# Allegro board OPAMP_TEST_V10A.brd
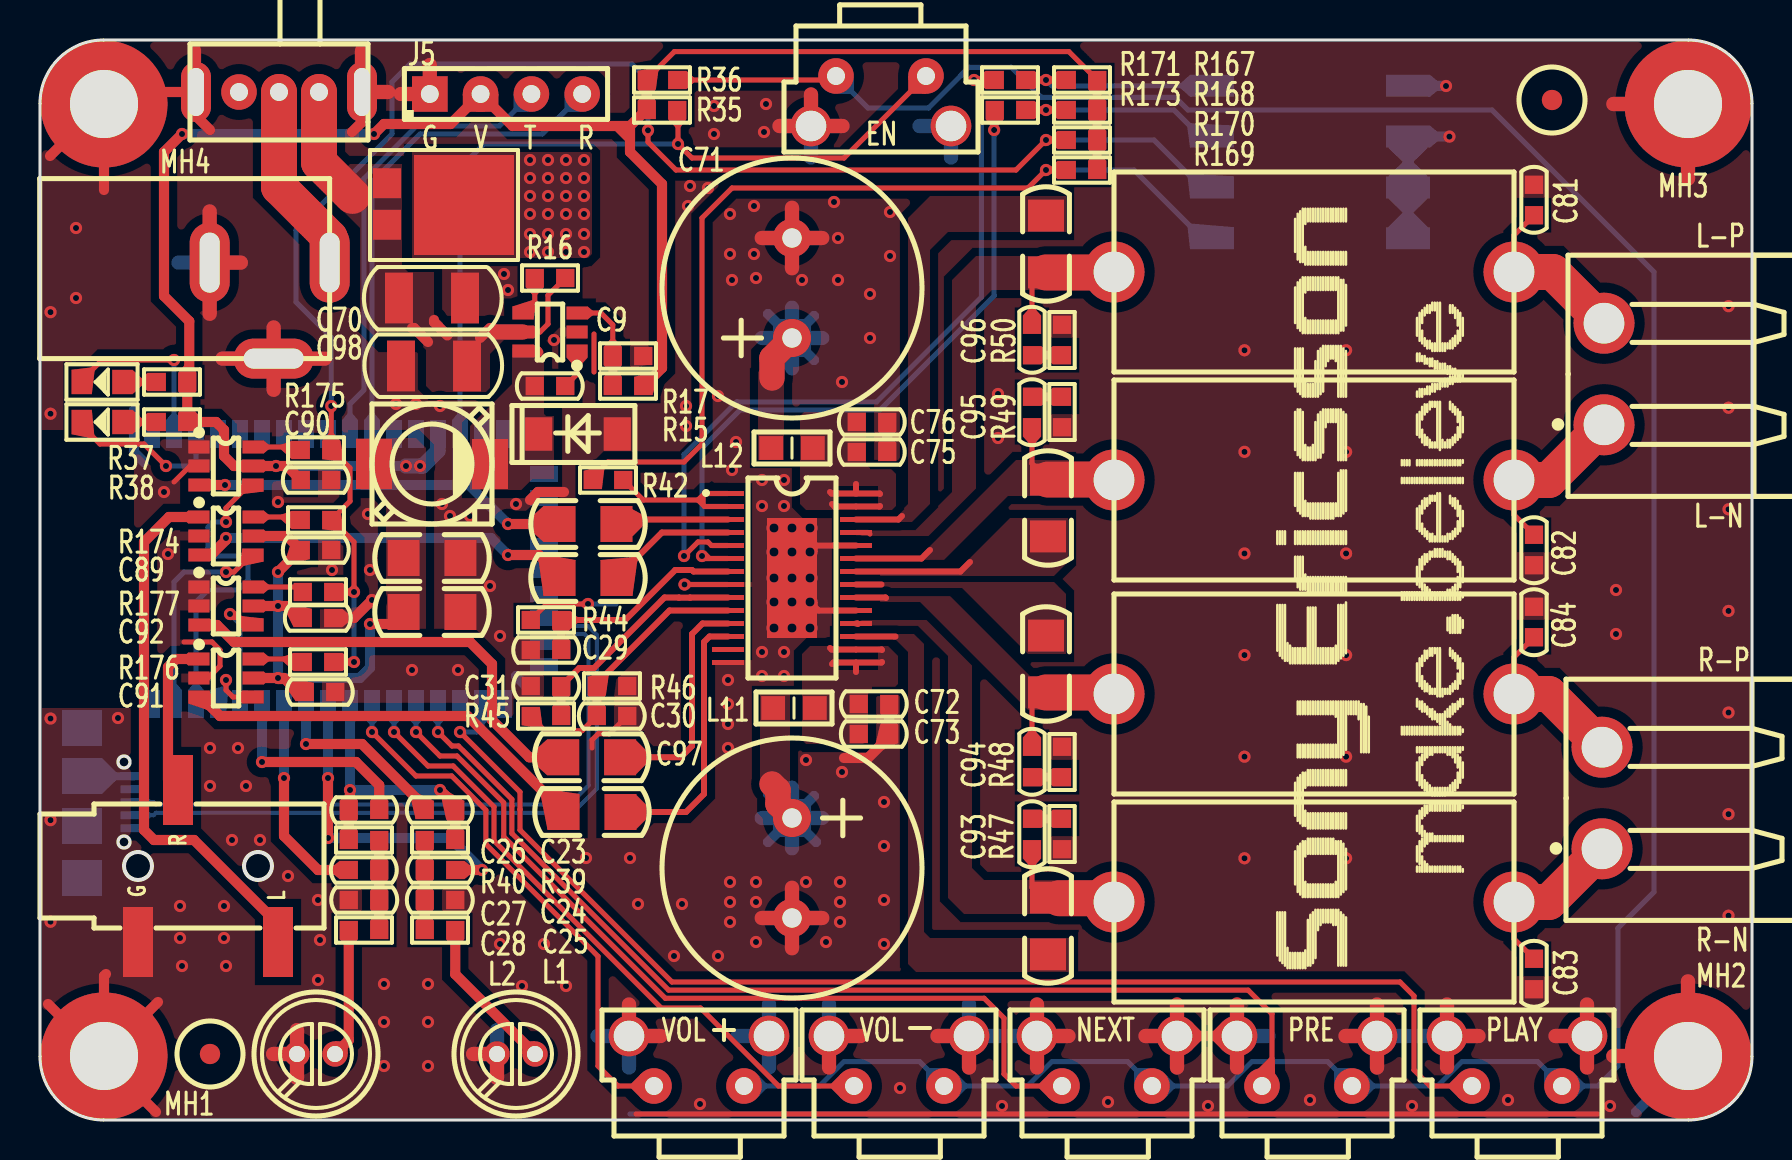
[diagram p0: board, top side]
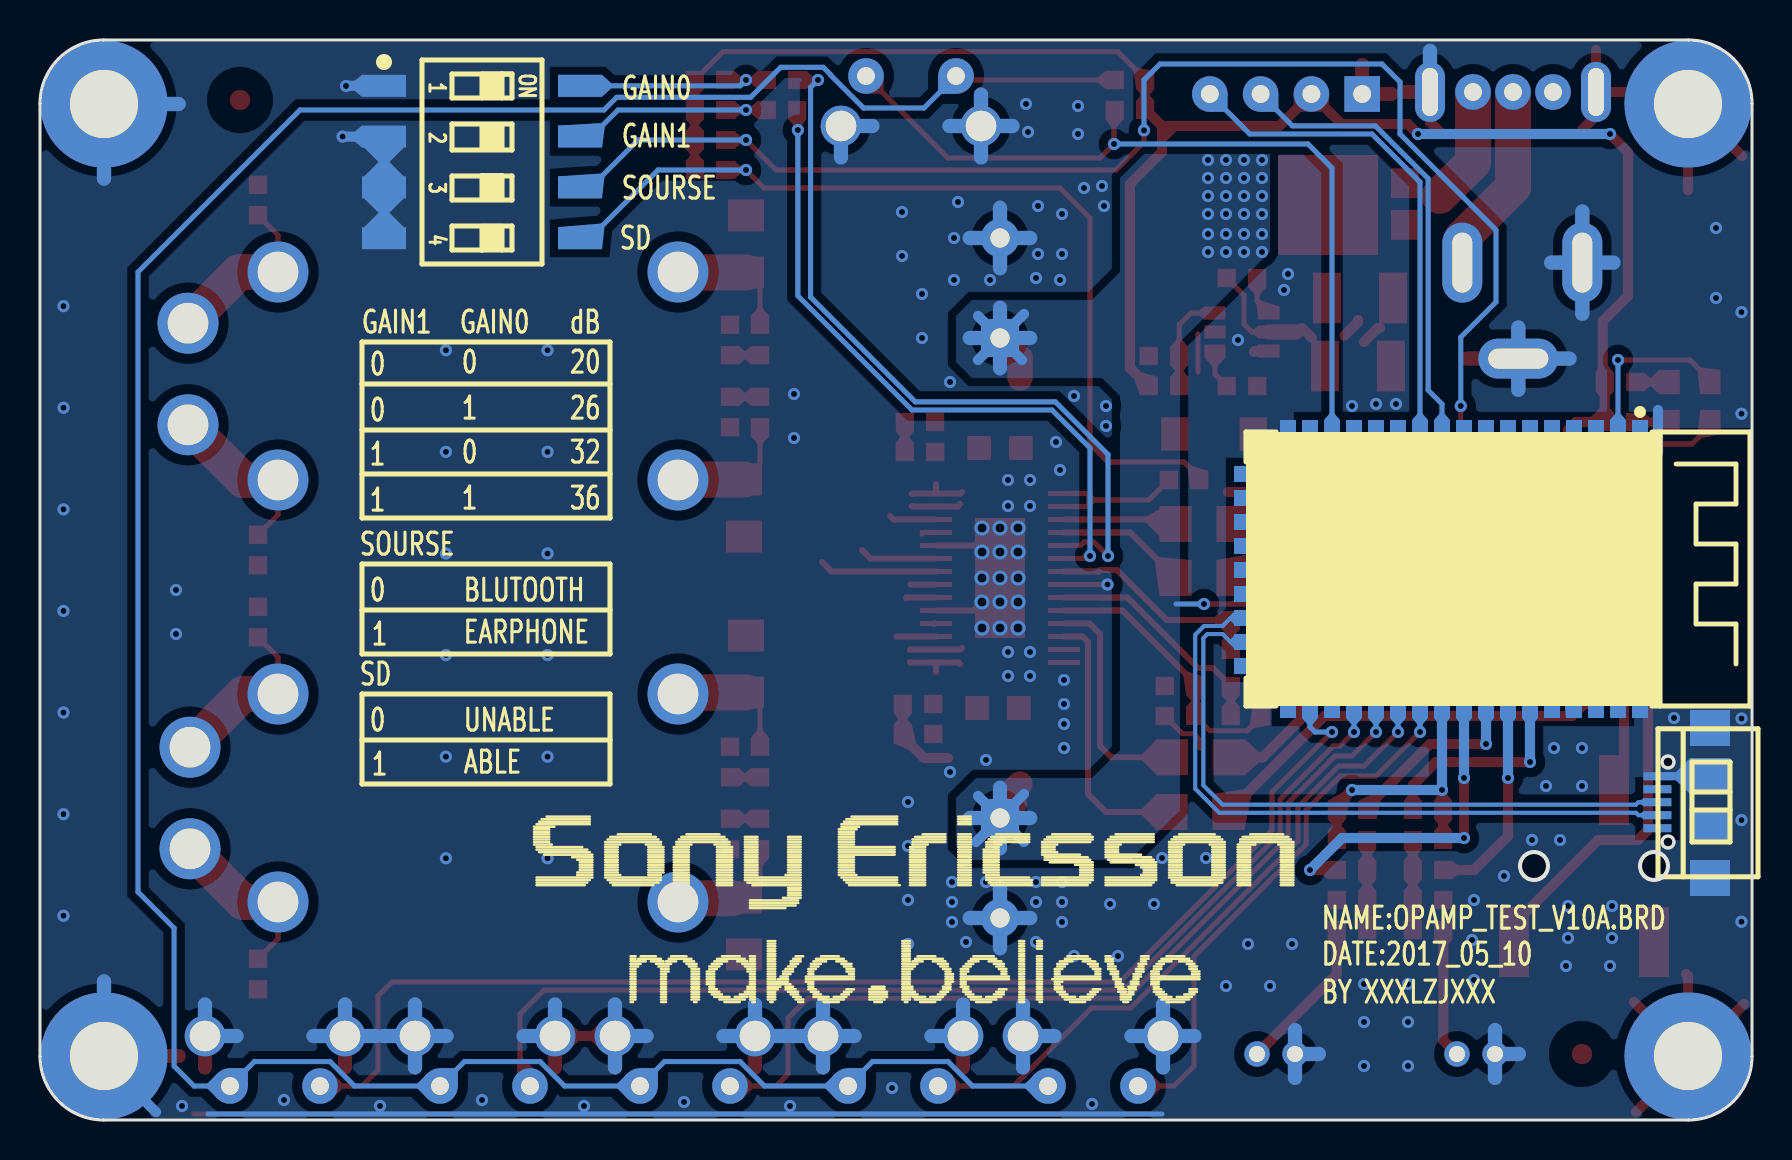
[diagram p1: board, bottom side, seen from below]

Outline 85.6 x 54 mm; copper layers: TOP, BOTTOM. Coordinates in mm from the lower left corner of the outline.
Outline path: 0,50.82 0,3.18 arc(0.93,0.93) 3.18,0 82.42,0 arc(84.67,0.93) 85.6,3.18 85.6,50.82 arc(84.67,53.07) 82.42,54 3.18,54 arc(0.93,53.07) 0,50.82

## Design rules (mm)
net group DP1: nets USB_DN USB_DP

## Placement (name value [footprint] x y rotation side)
C9  10nF_50V  [CC0603]  25.5 36.7 180 top
C10  22uF_10V  [CC1206]  19.6 28.1 0 top
C11  22uF_10V  [CC1206]  19.6 25.4 0 top
C23  0.1uF_50V  [CC0603]  20 15.5 180 top
C24  0.1uF_50V  [CC0603]  20 12.5 0 top
C25  15pF_50V  [CC0603]  20 11 180 top
C26  0.1uF_50V  [CC0603]  16.2 15.5 0 top
C27  0.1uF_50V  [CC0603]  16.2 12.5 180 top
C28  15pF_50V  [CC0603]  16.2 11 0 top
C29  0.1uF_50V  [CC0603]  25.3 23.5 0 top
C30  0.1uF_50V  [CC0603]  28.6 20.2 180 top
C31  0.1uF_50V  [CC0603]  25.3 21.7 0 top
C70  2.2uF_100V  [CC1210]  19.6 41.1 0 top
C71  1000uF_63V_16X20  [CAP-7R5-16X25]  37.6 39.1 90 top
C72  0.1uF_50V  [CC0603]  41.7 20.8 180 top
C73  1nF_50V  [CC0603]  41.7 19.3 180 top
C75  0.1uF_50V  [CC0603]  41.6 33.4 180 top
C76  1nF_50V  [CC0603]  41.6 34.9 180 top
C77  0.22uF_100V  [CC1206]  50.3 43.8 270 top
C78  0.22uF_100V  [CC1206]  50.4 30.6 90 top
C79  0.22uF_100V  [CC1206]  50.4 9.7 90 top
C80  0.22uF_100V  [CC1206]  50.3 22.8 270 top
C81  1nF_50V  [CC0603]  74.7 46 90 top
C82  1nF_50V  [CC0603]  74.7 28.5 270 top
C83  1nF_50V  [CC0603]  74.7 7.3 90 top
C84  1nF_50V  [CC0603]  74.7 24.9 270 top
C85  1uF_50V  [CC1206]  27.6 15.4 180 top
C86  1uF_50V  [CC1206]  27.58 18.14 180 top
C87  1uF_50V  [CC1206]  27.4 27.1 180 top
C88  1uF_50V  [CC1206]  27.4 29.8 180 top
C89  0.1uF_50V  [CC0603]  13.8 28.5 180 top
C90  0.1uF_50V  [CC0603]  13.8 32 180 top
C91  0.1uF_50V  [CC0603]  14 21.4 180 top
C92  0.1uF_50V  [CC0603]  13.9 25.1 180 top
C93  330pF_50V  [CC0603]  49.6 14.3 270 top
C94  330pF_50V  [CC0603]  49.6 17.9 90 top
C95  330pF_50V  [CC0603]  49.6 35.4 270 top
C96  330pF_50V  [CC0603]  49.6 39 90 top
C97  1000uF_63V_16X20  [CAP-7R5-16X25]  37.6 15.1 270 top
C98  2.2uF_100V  [CC1210]  19.7 37.7 180 top
D2  SS14  [DO-214AC]  26.9 34.3 0 top
D7  LED_GREEN  [LED0805]  3.1 36.9 180 top
D8  LED_GREEN  [LED0805]  3.1 34.9 180 top
D20  V10P10  [TO-227A]  21.2 45.8 270 top
DC1  -  [DC005]  8.48 42.87 0 top
J5  -  [HEADER4X1_2R54]  23.3 51.3 0 top
J9  WJ2EDGRC-5.08-2P  [WJ2EDGRC-5R08-2P]  78.2 37.3 90 top
J10  WJ2EDGRC-5.08-2P  [WJ2EDGRC-5R08-2P]  78.1 16.1 90 top
L1  15nH  [LC0603]  20 9.5 0 top
L2  15nH  [LC0603]  16.2 9.5 180 top
L11  BEAD_BLM21PG600  [LC0805]  37.7 20.6 180 top
L12  BEAD_BLM21PG600  [LC0805]  37.6 33.6 0 top
L13  L-1mmx20mm  [L-1MMX20MM]  63.7 42.4 0 top
L14  L-1mmx20mm  [L-1MMX20MM]  63.7 32 0 top
L15  L-1mmx20mm  [L-1MMX20MM]  63.7 21.3 0 top
L16  L-1mmx20mm  [L-1MMX20MM]  63.7 10.9 0 top
L17  SLF6028T-4R7M1R6-PF  [L-SLF6028]  19.6 32.8 270 top
MH1  Hold-M3  [HOLD250D134]  3.2 3.2 0 top
MH2  Hold-M3  [HOLD250D134]  82.4 3.2 0 top
MH3  Hold-M3  [HOLD250D134]  82.4 50.8 0 top
MH4  Hold-M3  [HOLD250D134]  3.2 50.8 0 top
MP1  MarkPoint  [MARKPOINT_R3]  8.5 3.3 0 top
MP2  MarkPoint  [MARKPOINT_R3]  75.6 51 0 top
NOREF  -  []  0 3.2 0 top
NOREF#2  -  []  84.83 52.89 0 top
NOREF#3  -  []  3.6 0 90 top
R15  49.9k  [RC0603]  29.4 36.7 180 top
R16  100K  [RC0603]  25.5 42.1 0 top
R17  16.2k  [RC0603]  29.4 38.2 0 top
R35  10K/NI  [RC0603]  31.1 50.5 0 top
R36  10K  [RC0603]  31.1 52 0 top
R37  1K  [RC0603]  6.6 36.9 180 top
R38  1K  [RC0603]  6.6 34.9 180 top
R39  2.2K  [RC0603]  20 14 180 top
R40  2.2K  [RC0603]  16.2 14 0 top
R42  1K  [RC0603]  28.4 32 0 top
R44  10R  [RC0603]  25.3 25 0 top
R45  10K  [RC0603]  25.3 20.2 0 top
R46  10K  [RC0603]  28.6 21.7 180 top
R47  10R  [RC0603]  51.1 14.3 270 top
R48  10R  [RC0603]  51.1 17.9 90 top
R49  10R  [RC0603]  51.1 35.4 270 top
R50  10R  [RC0603]  51.1 39 90 top
R167  10K  [RC0603]  52.1 52 180 top
R168  10K  [RC0603]  52.1 50.5 180 top
R169  10K  [RC0603]  52.1 47.5 180 top
R170  10K  [RC0603]  52.1 49 180 top
R171  0R  [RC0603]  48.5 52 180 top
R173  0R  [RC0603]  48.5 50.5 180 top
R174  0R  [RC0603]  13.8 30 0 top
R175  0R  [RC0603]  13.8 33.5 0 top
R176  0R  [RC0603]  13.9 22.9 0 top
R177  0R  [RC0603]  13.9 26.4 0 top
SW1  -  [SWITCH_3P]  16.1 51.4 180 top
SW2  KEY  [SW-6X6X6-L]  30.7 1.7 0 top
SW6  KEY  [SW-6X6X6-L]  40.7 1.7 0 top
SW7  KEY  [SW-6X6X6-L]  51.1 1.7 0 top
SW8  KEY  [SW-6X6X6-L]  61.1 1.7 0 top
SW9  KEY  [SW-6X6X6-L]  71.6 1.7 0 top
SW10  KEY  [SW-6X6X6-L]  44.3 52.2 180 top
SW11  -  [DM-04-V]  63.5 47.9 270 bottom
U1  TPA3110D2PWPR  [TSSOP-28-PAD]  37.6 27.1 270 top
U2  -  [CSR8645-MUDULE]  5.6 34.3 270 bottom
U7  -  [MIC]  23.8 3.3 180 top
U8  -  [EARPHONE]  7.1 12.7 90 top
U9  -  [MIC]  13.8 3.3 180 top
U10  TS5A3159DBVR  [SOT23-6]  9.3 29.2 270 top
U11  TS5A3159DBVR  [SOT23-6]  9.3 32.7 270 top
U12  TS5A3159DBVR  [SOT23-6]  9.3 22.1 270 top
U13  TS5A3159DBVR  [SOT23-6]  9.3 25.7 270 top
U14  MP2359DJ-LF-Z  [TSOT23-6]  25.5 39.4 90 top
USB1  -  [USB-MICRO]  4.8 15.9 90 bottom

## Library data of the parts
C9-C11 C23-C31 C70 C72 C73 C75-C96 C98 = CAP NP_2
C71 C97 = CAPT_100UF_3528_6r3V_10%_LXXXX
D2 = DIODE13_8
D7 D8 = LED_4
D20 = DIODE13_6
DC1 = DC005
J5 = CONN RCPT 4
J9 J10 = WJ2EDGRC-5_0.08-2P
L1 L2 = INDUCTOR
L11-L16 = IND_BEAD_0805_600OHM_200MA
L17 = INDUCTOR_0
MH1-MH4 = Hold_1
MP1 MP2 = MarkPoint
R15-R17 R35-R40 R42 R44-R50 R167-R171 R173-R177 = R_Generic
SW1 = SWITCH_3P
SW2 SW6-SW10 = SWITCH-SPST-4P
SW11 = SW DIP-4_0
U1 = TPA3110D2PWPR
U2 = CSR8645-MUDULE
U7 U9 = MIC
U8 = EARPHONE
U10-U13 = TS5A3159DBVR_0
U14 = MP2359DJ-LF-Z
USB1 = USB-MICRO

## Footprints (pads in the part's own frame, mm; a bottom-side part is the same pattern mirrored in y, then rotated)
CAP-7R5-16X25
  round 1.905 hole 0.965: 1(0,0) 2(5,0)
CC0603
  rect 0.914x0.914 smd: 1(-0.762,0) 2(0.762,0)
CC1206
  rect 1.6x1.8 smd: 1(-1.422,0) 2(1.422,0)
CC1210
  rect 1.397x2.54 smd: 1(-1.651,0) 2(1.651,0)
CSR8645-MUDULE
  rect 1.4x0.8 smd: 1(0,0) 2(0,-1.1) 3(0,-2.2) 4(0,-3.3) 5(0,-4.4) 6(0,-5.5) 7(0,-6.6) 8(0,-7.7) 9(0,-8.8) 10(0,-9.9) 11(0,-11) 12(0,-12.1) 13(0,-13.2) 14(0,-14.3) 15(0,-15.4) 16(0,-16.5) 17(0,-17.6) 27(13.5,-17.6) 28(13.5,-16.5) 29(13.5,-15.4) 30(13.5,-14.3) 31(13.5,-13.2) 32(13.5,-12.1) 33(13.5,-11) 34(13.5,-9.9) 35(13.5,-8.8) 36(13.5,-7.7) 37(13.5,-6.6) 38(13.5,-5.5) 39(13.5,-4.4) 40(13.5,-3.3) 41(13.5,-2.2) 42(13.5,-1.1) 43(13.5,0)
  rect 0.8x1.4 smd: 18(2,-19.6) 19(3.2,-19.6) 20(4.4,-19.6) 21(5.6,-19.6) 22(6.8,-19.6) 23(8,-19.6) 24(9.2,-19.6) 25(10.4,-19.6) 26(11.6,-19.6)
DC005
  oval 2x4 hole 1x3: 1(6,0) 2(0,0)
  oval 4x2 hole 3x1: 3(3.2,-4.8)
DM-04-V
  rect 1.1x2.2 smd: 1(-3.81,-4.9) 2(-1.27,-4.9) 3(1.27,-4.9) 4(3.81,-4.9) 5(3.81,4.9) 6(1.27,4.9) 7(-1.27,4.9) 8(-3.81,4.9)
DO-214AC
  rect 1.36x1.67 smd: 1(1.965,0) 2(-1.965,0)
EARPHONE
  rect 3.5x1.5 smd: 1(3.8,0.2) 2(-3.8,-4.8) 3(-3.8,2.2)
HEADER4X1_2R54
  rect 1.778x1.778 hole 0.889: 1(-3.81,0)
  round 1.778 hole 0.889: 2(-1.27,0) 3(1.27,0) 4(3.81,0)
HOLD250D134
  round 6.35 hole 3.404: 1(0,0)
L-1MMX20MM
  round 3.048 hole 2.032: 1(-10,0) 2(10,0)
L-SLF6028
  rect 2.5x1.8 smd: 1(0,2.9) 2(0,-2.9)
LC0603
  rect 0.914x0.914 smd: 1(-0.762,0) 2(0.762,0)
LC0805
  rect 1.194x1.194 smd: 1(-1.041,0) 2(1.041,0)
LED0805
  rect 1.016x1.219 smd: 1(-1.016,0) 2(1.016,0)
MARKPOINT_R3
  round 1.016 smd: 1(0,0)
MIC
  round 1.27 hole 0.8: 1(-0.95,0) 2(0.95,0)
RC0603
  rect 0.914x0.914 smd: 1(-0.762,0) 2(0.762,0)
SOT23-6
  rect 0.65x1.06 smd: 1(-0.95,-1.354) 2(0,-1.354) 3(0.95,-1.354) 4(0.95,1.354) 5(0,1.354) 6(-0.95,1.354)
SW-6X6X6-L
  round 2.032 hole 1.524: 1(-1.25,2.5) 4(5.75,2.5)
  round 1.778 hole 0.889: 2(0,0) 3(4.5,0)
SWITCH_3P
  oval 1.5x3 hole 0.8x2.4: 1(0,0) 5(8.3,0)
  round 1.778 hole 0.889: 2(2.15,0) 3(4.15,0) 4(6.15,0)
TO-227A
  rect 1.5x1.4 smd: 1(1.04,-3.85) 2(-1.04,-3.85)
  rect 5x5 smd: 3(0.05,0)
TSOT23-6
  rect 0.65x1.06 smd: 1(-0.95,-1.354) 2(0,-1.354) 3(0.95,-1.354) 4(0.95,1.354) 5(0,1.354) 6(-0.95,1.354)
TSSOP-28-PAD
  rect 0.25x1.6 smd: 1(-4.225,-3.2) 2(-3.575,-3.2) 3(-2.925,-3.2) 4(-2.275,-3.2) 5(-1.625,-3.2) 6(-0.975,-3.2) 7(-0.325,-3.2) 8(0.325,-3.2) 9(0.975,-3.2) 10(1.625,-3.2) 11(2.275,-3.2) 12(2.925,-3.2) 13(3.575,-3.2) 14(4.225,-3.2) 15(4.225,3.2) 16(3.575,3.2) 17(2.925,3.2) 18(2.275,3.2) 19(1.625,3.2) 20(0.975,3.2) 21(0.325,3.2) 22(-0.325,3.2) 23(-0.975,3.2) 24(-1.625,3.2) 25(-2.275,3.2) 26(-2.925,3.2) 27(-3.575,3.2) 28(-4.225,3.2)
  rect 6x2.5 smd: 29(0,0)
USB-MICRO
  rect 0.4x1.4 smd: 1(-1.31,-0.07) 2(-0.66,-0.07) 3(-0.01,-0.07) 4(0.64,-0.07) 5(1.29,-0.07)
  rect 1.8x2 smd: 6(-3.8,-2.7) 7(-1.2,-2.7) 8(1.3,-2.7) 9(3.7,-2.7)
WJ2EDGRC-5R08-2P
  round 3.048 hole 2.032: 1(-2.54,0) 2(2.54,0)

## Nets
AGND: C10.2 C11.2 C25.1 C28.1 C29.1 C30.1 C31.1 C70.2 C71.2 C72.1 C73.1 C75.1 C76.1 C81.2 C82.2 C83.1 C84.1 C89.1 C90.1 C91.1 C92.1 C97.2 C98.2 D2.1(ANODE) DC1.2 DC1.3 J5.1 MH1.1 MH2.1 MH3.1 MH4.1 R17.2 R46.1 R47.2 R48.2 R49.2 R50.2 SW1.1 SW1.5 SW2.1 SW2.4 SW6.1 SW6.4 SW7.1 SW7.4 SW8.1 SW8.4 SW9.1 SW9.4 SW10.1 SW10.4 SW11.1 SW11.2 SW11.3 SW11.4 U1.8(AGND) U1.14(PBTL) U1.19(PGND_1) U1.24(PGND_2) U1.29(GND) U2.17(GND) U2.43(AGND) U7.2(-) U8.3(G) U9.2(-) U10.2(GND) U11.1(NO) U11.2(GND) U12.2(GND) U13.1(NO) U13.2(GND) U14.2(GND) USB1.5(GND) USB1.6(P_2) USB1.7(P_1) USB1.8(P_3) USB1.9(P_4)
PVCC: C71.1 C97.1 D20.3(CATHODE) L11.2(B) L12.1(A) R44.1
VBUS: USB1.1(VBUS)
VCC_3.3V: C10.1 C11.1 C89.2 C90.2 C91.2 C92.2 J5.2 L17.2 R15.1 R35.1 R36.1 R37.1 R38.1 R167.1 R168.1 R169.1 R170.1 U2.14(BAT) U10.5(VCC) U11.5(VCC) U12.5(VCC) U13.5(VCC)
VCC_24V: C70.1 C98.1 D20.1(ANODE_1) D20.2(ANODE_2) R16.2 SW1.2 U14.5(IN)
BLE_MIC_AN: C24.2 U2.35(MIC_AN)
BLE_MIC_AP: C23.2 U2.36(MIC_AP)
BLE_MIC_BIAS: C23.1 C26.1 R39.1 R40.1 U2.34(MIC_BIAS)
BLE_MIC_BN: C27.2 U2.37(MIC_BN)
BLE_MIC_BP: C26.2 U2.38(MIC_BP)
BLE_RX: J5.4 U2.11(RX)
BLE_SPK_L_N1: U2.41(SPK_L_N1) U11.4(COM)
BLE_SPK_L_P1: U2.42(SPK_L_P1) U10.4(COM)
BLE_SPK_R_N1: U2.39(SPK_R_N1) U13.4(COM)
BLE_SPK_R_P1: U2.40(SPK_R_P1) U12.4(COM)
BLE_TX: J5.3 U2.10(TX)
CTL_SHUTDOWN: R42.1 R169.2 SW11.5
CTL_SOURSE: R170.2 R174.2 R175.2 R176.2 R177.2 SW11.6
EARPHONR_L: U8.2(L) U10.1(NO)
EARPHONR_R: U8.1(R) U12.1(NO)
GAIN0: R171.2 U1.5(GAIN0)
GAIN1: R173.2 U1.6(GAIN1)
LINN: C88.2 U11.3(NC)
LINP: C87.2 U10.3(NC)
NEXT: SW7.2 U2.31(PIO19)
OUTNL: C82.1 J9.1 L14.2(B)
OUTNR: C83.2 J10.1 L16.2(B)
OUTPL: C81.1 J9.2 L13.2(B)
OUTPR: C84.2 J10.2 L15.2(B)
PLAY/PAUSE: SW9.2 U2.28(PIO7)
POWER_EN: R35.2 SW10.2 U2.15(POWER_EN)
PRE: SW8.2 U2.30(PIO18)
RINN: C86.2 U13.3(NC)
RINP: C85.2 U12.3(NC)
USB_DN: U2.24(USB_N) USB1.2(D-)
USB_DP: U2.25(USB_P) USB1.3(D+)
VOL+: SW2.2 U2.33(PIO21)
VOL-: SW6.2 U2.32(PIO20)
N16803192: R36.2 SW2.3 SW6.3 SW7.3 SW8.3 SW9.3 SW10.3
N16804485: D7.1(ANODE) R37.2
N16804487: D8.1(ANODE) R38.2
N16804547: D7.2(CATHODE) U2.2(LED1)
N16804550: D8.2(CATHODE) U2.3(LED0)
N16805157: L1.2 U7.1(+)
N16805178: C24.1 C25.2 L1.1 R39.2
N16806457: L2.2 U9.1(+)
N16806471: C27.1 C28.2 L2.1 R40.2
N16809175: DC1.1 SW1.3
N16809398: R42.2 U1.1(S\D\) U1.2(F\A\U\L\T\)
N16810006: C29.2 R44.2 U1.7(AVCC)
N16810025: C31.2 R45.2 U1.9(GVDD)
N16810063: C30.2 R45.1 R46.2 U1.10(PLIMIT)
N16810289: C86.1 U1.11(RINN)
N16810301: C85.1 U1.12(RINP)
N16811253: C72.2 C73.2 L11.1(A) U1.15(PVCCR_1) U1.16(PVCCR_2)
N16811667: C75.2 C76.2 L12.2(B) U1.27(PVCCL_1) U1.28(PVCCL_2)
N16812366: C77.1 U1.26(BSPL)
N16812369: C77.2 C96.2 L13.1(A) U1.25(OUTPL)
N16812727: C78.2 C95.2 L14.1(A) U1.23(OUTNL)
N16812730: C78.1 U1.22(BSNL)
N16812892: C80.2 C94.2 L15.1(A) U1.20(OUTNR)
N16812895: C79.2 C93.2 L16.1(A) U1.18(OUTPR)
N16812974: C79.1 U1.17(BSPR)
N16812997: C80.1 U1.21(BSNR)
N16813988: C88.1 U1.3(LINP)
N16814000: C87.1 U1.4(LINN)
N16814782: R174.1 U10.6(IN)
N16815623: R175.1 U11.6(IN)
N16815830: R176.1 U12.6(IN)
N16816045: R177.1 U13.6(IN)
N16817792: C93.1 R47.1
N16817979: C94.1 R48.1
N16818097: C95.1 R49.1
N16818322: C96.1 R50.1
N16818770: C9.2 D2.2(CATHODE) L17.1 U14.6(SW)
N16818772: C9.1 U14.1(BST)
N16818790: R15.2 R17.1 U14.3(FB)
N16818960: R16.1 U14.4(EN)
N16821549: R167.2 R171.1 SW11.8
N16821551: R168.2 R173.1 SW11.7

Pads without a net: MP1 1; MP2 1; SW1 4; U1 13; U2 1 4 5 6 7 8 9 12 13 16 18 19 20 21 22 23 26 27 29; USB1 4

## Via types
v1: diameter 0.61, hole 0.305, TOP to BOTTOM, 222 vias
v2: diameter 0.762, hole 0.457, TOP to BOTTOM, 15 vias

## Routing (per net, layer and track width the routed paths; a pad name or vN(x,y) marks a point on that pad's centre or on a via; arc(x,y) is an arc through that point)
AGND: length 376.7
  TOP w0.254: U12.2 8.4,22.1 9,22.7 9,23.5 8.6,23.9 7.2,23.9 ; U1.8 v1(32.23,26.77) ; 77.9,0.3 29.8,0.3 ; 6.7,31.9 7.5,32.7 U11.2 ; 27.6,18.6 27.6,19 27.91,19.31 28.48,19.31 C30.1
  TOP w0.3: U1.19 38.92,25.48 v2(38.5,25.9) ; v2(38.5,28.4) 38.83,28.73 U1.24
  TOP w0.508: 26.2,31.4 24.9,31.4 24.5,31 ; 40.2,18.1 41.4,18.1 42.46,19.16 C73.1 C72.1 ; MH1.1 3.2,7.2 3.3,7.3 ; MH1.1 5.9,5.9 ; MH1.1 3,3.2 0.4,5.8 ; MH1.1 3.2,3 5.8,0.4 ; SW1.5 7.8,53.5 ; SW1.5 3.8,51.4 MH4.1 ; SW1.5 7.8,50.2 8.5,49.5 ; v1(16.6,26) 15.7,25.1 C92.1 ; MH4.1 3.1,50.8 0.5,48.2 ; MH4.1 3.2,46.5 ; C75.1 C76.1 ; SW1.1 16.1,49.9 15.6,49.4 ; SW8.1 SW7.4
  TOP w0.711: 59.85,2.62 SW8.1 59.85,5.78 ; 46.45,2.62 SW6.4 44.88,4.2 ; 36.09,44.1 C71.2 ; C71.2 39.11,44.1 ; C71.2 37.6,42.59 ; C71.2 37.6,45.61 ; DC1.3 14.24,38.07 ; DC1.3 9.13,38.07 ; DC1.3 11.68,36.51 ; DC1.3 11.68,39.63 ; 66.85,2.62 SW8.4 ; SW8.4 66.85,5.78 ; SW8.4 65.28,4.2 ; 75.78,4.2 SW9.4 ; SW9.4 77.35,2.62 ; SW9.4 77.35,5.78 ; DC1.2 10.04,42.87 ; DC1.2 8.48,40.31 ; DC1.2 8.48,45.43 ; 82.4,47.07 MH3.1 78.67,50.8 ; SW9.1 71.92,4.2 ; SW9.1 70.35,5.78 ; SW9.1 70.35,2.62 ; 36.09,10.1 C97.2 ; C97.2 37.6,8.59 ; C97.2 39.11,10.1 ; C97.2 37.6,11.61 ; SW7.1 51.42,4.2 ; SW7.1 49.85,2.62 ; SW7.1 49.85,5.78 ; 16.1,53.46 SW1.1 17.41,51.4 ; 39.45,2.62 SW6.1 41.02,4.2 ; 78.67,3.2 MH2.1 82.4,6.93 ; 19.49,52.75 J5.1 18.04,51.3 ; 12.85,2.11 U9.2 ; U9.2 11.66,3.3 ; U9.2 12.85,4.49 ; 56.85,2.62 SW7.4 ; SW7.4 56.85,5.78 ; SW7.4 55.27,4.2 ; 36.98,49.7 SW10.4 ; SW10.4 38.55,51.27 ; SW10.4 40.12,49.7 ; 31.02,4.2 SW2.1 29.45,5.78 ; 22.85,2.11 U7.2 21.66,3.3
  BOTTOM w0.254: 29.5,0.3 77.2,0.3
  BOTTOM w0.4: USB1.8 2.11,17.19 USB1.5
  BOTTOM w0.508: v1(70.3,51.7) 70.29,51.71 SW11.1 ; 4.7,35.5 4.7,33.4 5.2,32.9 ; MH2.1 82.4,3 79.8,0.4 ; 23.8,22.2 24.3,21.7 ; SW11.4 SW11.3 SW11.2 v1(70.47,49.17) 70.5,49.2
  BOTTOM w0.711: 55.27,4.2 SW7.4 ; SW7.4 56.85,5.78 ; SW7.4 56.85,2.62 ; SW9.1 70.35,5.78 ; SW9.1 68.78,4.2 ; SW9.1 71.92,4.2 ; 36.98,49.7 SW10.4 ; SW10.4 38.55,51.27 ; SW10.4 38.55,48.12 ; SW10.4 40.12,49.7 ; 82.4,47.07 MH3.1 78.67,50.8 ; 11.66,3.3 U9.2 ; U9.2 12.85,2.11 ; U9.2 12.85,4.49 ; 77.35,5.78 SW9.4 75.78,4.2 ; 46.45,2.62 SW6.4 ; SW6.4 44.88,4.2 ; SW6.4 46.45,5.78 ; SW6.4 48.02,4.2 ; SW1.1 16.1,53.46 ; 11.68,36.51 DC1.3 ; DC1.3 11.68,39.63 ; DC1.3 9.13,38.07 ; DC1.2 10.04,42.87 ; DC1.2 8.48,40.31 ; DC1.2 8.48,45.43 ; DC1.2 6.93,42.87 ; C71.2 39.11,44.1 ; C71.2 37.6,42.59 ; C71.2 37.6,45.61 ; C71.2 36.09,44.1 ; 27.88,4.2 SW2.1 ; SW2.1 31.02,4.2 ; SW2.1 29.45,5.78 ; SW2.1 29.45,2.62 ; 36.09,10.1 C97.2 ; C97.2 37.6,11.61 ; C97.2 37.6,8.59 ; C97.2 39.11,10.1 ; 21.66,3.3 U7.2 ; U7.2 22.85,4.49 ; U7.2 22.85,2.11 ; SW2.4 36.45,5.78 ; SW2.4 36.45,2.62 ; SW2.4 34.88,4.2 ; SW7.1 49.85,5.78 ; SW7.1 48.27,4.2 ; SW7.1 51.42,4.2 ; MH2.1 82.4,6.93 ; SW8.4 66.85,5.78 ; SW8.4 68.42,4.2 ; SW8.4 65.28,4.2 ; SW8.4 66.85,2.62 ; 61.42,4.2 SW8.1 59.85,5.78 ; 43.98,49.7 SW10.1 45.55,48.12 ; 39.45,5.78 SW6.1 41.02,4.2
  vias: v1(0.53,40.39) v1(0.53,35.31) v1(0.53,20.07) v1(0.53,14.99) v1(0.53,9.91) v1(1.8,44.6) v1(1.8,41.1) v1(3.9,20.1) v1(6.2,31.4) v1(6.4,28.3) v1(7,10.7) v1(7,9.1) v1(7.1,7.7) v1(8.5,18.6) v1(8.5,16.7) v1(9.2,10.7) v1(9.2,9.1) v1(9.3,7.7) v1(9.6,14) v1(9.9,18.6) v1(10.3,16.7) v1(11,14) v1(11.9,30.9) v1(12.4,12.2) v1(13.9,11) v1(13.9,7) v1(14,9) v1(14.6,27.5) v1(16.4,30.3) v1(16.5,27.5) v1(17.2,6.8) v1(17.2,4.9) v1(17.2,2.7) v1(17.8,35.8) v1(18.6,22.5) v1(18.8,35.8) v1(19.4,6.8) v1(19.4,4.9) v1(19.4,2.7) v1(20,35.7) v1(20.1,30.8) v1(20.5,30.2) v1(20.9,22.5) v1(21.5,30.2) v1(22.5,26.7) v1(23,24.2) v1(23,8.8) v1(23.2,42.3) v1(23.4,41.5) v1(23.8,30.8) v1(24.1,6.7) v1(25.2,8.8) v1(25.7,39) v1(26.3,6.7) v1(27.3,13.1) v1(29.5,13.1) v1(29.9,10.8) v1(31.7,8.2) v1(32.1,10.8) v1(32.3,35.7) v1(32.3,34.7) v1(32.4,45.7) v1(32.5,46.7) v1(33,0.8) v1(33.4,46.6) v1(33.7,50.7) v1(33.7,49.3) v1(33.9,36.2) v1(33.9,8.2) v1(34.4,22) v1(34.4,20.8) v1(34.4,19.8) v1(34.4,18.6) v1(34.5,45.3) v1(34.5,43.3) v1(34.5,11.9) v1(34.5,10.9) v1(34.5,9.9) v1(34.6,42) v1(34.6,32.5) v1(34.8,33.9) v1(35.7,45.7) v1(35.7,43.3) v1(35.8,42.1) v1(35.8,11.9) v1(35.8,10.9) v1(35.8,8.9) v1(36.1,32) v1(36.1,30.7) v1(36.1,23.4) v1(36.1,22.2) v1(36.2,49.4) v1(36.3,50.8) v1(37.2,32) v1(37.2,30.7) v1(37.2,23.4) v1(37.2,22.2) v1(38.1,42) v1(38.3,18) v1(38.3,11.9) v1(39.3,8.9) v1(39.7,45.9) v1(39.9,44.1) v1(39.9,42) v1(40,11.9) v1(40,10.9) v1(40,9.9) v1(40.1,36.9) v1(40.1,17.4) v1(41.5,41.3) v1(41.5,39.1) v1(42.2,15.9) v1(42.2,13.7) v1(42.2,11) v1(42.2,8.8) v1(42.5,45.4) v1(42.5,43.2) v1(43,1.6) v1(47.9,36.3) v1(47.9,34.1) v1(48.1,0.7) v1(53.4,0.9) v1(58.4,0.7) v1(60.22,38.49) v1(60.22,33.41) v1(60.22,28.33) v1(60.22,23.25) v1(60.22,18.17) v1(60.22,13.09) v1(63.5,1) v1(65.3,38.49) v1(65.3,33.41) v1(65.3,28.33) v1(65.3,23.25) v1(65.3,18.17) v1(65.3,13.09) v1(68.6,0.7) v1(73.4,1) v1(78.5,0.7) v1(78.8,26.5) v1(78.8,24.3) v1(84.43,40.69) v1(84.43,35.61) v1(84.43,30.53) v1(84.43,25.45) v1(84.43,20.37) v1(84.43,15.29) v1(84.43,10.21) v2(36.7,29.6) v2(36.7,28.4) v2(36.7,27.1) v2(36.7,25.9) v2(36.7,24.6) v2(37.6,29.6) v2(37.6,28.4) v2(37.6,27.1) v2(37.6,25.9) v2(37.6,24.6) v2(38.5,29.6) v2(38.5,27.1) v2(38.5,24.6)
PVCC: length 34.2
  TOP w0.254: R44.1 25.34,25.8 v1(27.4,25.8)
  TOP w1.27: C71.1 36.6,38.1 36.6,37.1 ; 36.6,16.8 36.9,16.5 36.9,15.8 C97.1
  BOTTOM w0.254: v1(27.4,25.8) 28.8,25.8
  BOTTOM w0.508: C71.1 38.7,38 ; C71.1 36.4,40.3 ; C71.1 38.7,40.2 ; C71.1 36.5,38 ; C97.1 38.8,13.9 ; C97.1 36.4,16.3 ; C97.1 38.7,16.2 ; C97.1 36.4,13.9
  BOTTOM w0.711: 37.6,37.59 C71.1 ; C71.1 39.11,39.1 ; C71.1 36.09,39.1 ; C71.1 37.6,40.61 ; C97.1 39.11,15.1 ; C97.1 36.09,15.1 ; C97.1 37.6,16.61 ; C97.1 37.6,13.59
  vias: v1(24.5,48) v1(24.5,47.1) v1(24.5,46.2) v1(24.5,45.3) v1(24.5,44.3) v1(24.5,43.4) v1(25.4,48) v1(25.4,47.1) v1(25.4,46.2) v1(25.4,45.3) v1(25.4,44.3) v1(25.4,43.4) v1(26.3,48) v1(26.3,47.1) v1(26.3,46.2) v1(26.3,45.3) v1(26.3,44.3) v1(26.3,43.4) v1(27.2,48) v1(27.2,47.1) v1(27.2,46.2) v1(27.2,45.3) v1(27.2,44.3) v1(27.2,43.4)
VCC_3.3V: length 125.2
  TOP w0.254: R36.1 30.34,52.04 31.72,53.42 51.44,53.42 R167.1 R168.1 R170.1 R169.1
  TOP w0.508: C91.2 12.9,21.4 12.2,22.1 v1(11.9,22.1) U12.5 ; v1(16.5,24.8) 17.58,24.8 C11.1 ; 29.5,49.7 23.63,49.7 J5.2 20.53,49.8 17.2,49.8 v1(16.7,49.3) ; 29.5,49.7 29.5,48.4 31.1,46.8 31.1,37.6 30.2,36.7 R15.1 ; 29.5,49.7 30.3,50.5 R35.1 R36.1 ; U13.5 v1(11.9,25.7) 12.35,25.7 12.95,25.1 C92.2 ; U10.5 12.34,29.2 C89.2 13,28.5 v1(11.9,27.4) ; v1(7.1,49.3) 6.2,48.4 6.2,41.2 7.46,39.94 7.46,37 R37.1 R38.1 8.8,34.9 9.2,34.5 9.2,33.2 9.7,32.7 U11.5 v1(11.8,32.7) 12.34,32.7 C90.2
  BOTTOM w0.508: v1(16.5,24.8) 16.5,22.61 15.99,22.1 v1(11.9,22.1) v1(11.9,25.7) v1(11.9,27.4) ; v1(11.8,32.7) v1(18.3,32.7) ; v1(7.1,49.3) v1(16.7,49.3)
  BOTTOM w0.762: U2.14 19.9,33.46 19.14,32.7 v1(19,32.7) v1(18.3,32.7)
VCC_24V: length 14.2
  TOP w0.254: U14.5 25,39.4 25.4,39.8 25.4,41.24 R16.2
  TOP w0.508: 18.6,39.6 18.7,39.6 19.4,38.9 ; 22,39.1 22.5,39.6 ; 19.7,40 19.7,39.9 20.37,39.23
  TOP w0.762: U14.5 22.8,39.4
  TOP w1.8: 15.62,46.21 13.95,47.88 SW1.2
BLE_MIC_AN: length 16.4
  TOP w0.508: v1(14.4,17.1) v1(14.4,14.1) ; v1(22.1,12.5) C24.2
  BOTTOM w0.508: v1(14.4,14.1) 20.5,14.1 v1(22.1,12.5) ; U2.35 v1(14.4,17.1)
BLE_MIC_AP: length 9.4
  TOP w0.508: v1(13.3,18.8) 16.1,18.8 19.24,15.66 C23.2
  BOTTOM w0.508: U2.36 v1(13.3,18.8)
BLE_MIC_BIAS: length 14.1
  TOP w0.508: v1(15.5,16.5) 15.5,15.56 C26.1 R40.1 ; R39.1 C23.1 20.76,15.74 v1(20,16.5)
  BOTTOM w0.508: U2.34 v1(15.5,16.5) v1(20,16.5)
BLE_MIC_BN: length 10.5
  TOP w0.508: v1(12.2,17.1) 12.2,14.2 13.9,12.5 C27.2
  BOTTOM w0.508: U2.37 v1(12.2,17.1)
BLE_MIC_BP: length 10.5
  TOP w0.508: C26.2 16.96,16.74 15.8,17.9 v1(11.1,17.9)
  BOTTOM w0.508: U2.38 v1(11.1,17.9)
BLE_RX: length 24.9
  BOTTOM w0.254: J5.4 25.11,49.3 19,49.3 16.6,46.9 U2.11
BLE_SPK_L_N1: length 15.9
  TOP w0.254: v1(9.3,29.9) 9.3,30.6 10.45,31.75 U11.4
  BOTTOM w0.254: U2.41 7.8,25.9 8.4,26.5 9.9,26.5 10.4,27 10.4,27.9 10.1,28.2 8.8,28.2 8.4,28.6 8.4,29.65 8.65,29.9 v1(9.3,29.9)
BLE_SPK_L_P1: length 10.6
  TOP w0.254: v1(9.3,27.4) 9.7,27.4 10.55,28.25 U10.4
  BOTTOM w0.254: U2.42 6.7,26.9 7.2,27.4 v1(9.3,27.4)
BLE_SPK_R_N1: length 6.1
  TOP w0.254: U13.4 10.6,24.8 10.3,24.8 9.8,25.3 v1(9.5,25.3)
  BOTTOM w0.254: v1(9.5,25.3) 10,24.8 U2.39
BLE_SPK_R_P1: length 3.4
  TOP w0.254: v1(9.3,22) 9.3,21.5 9.65,21.15 U12.4
  BOTTOM w0.254: v1(9.3,22) 9.3,21.6 8.9,21.2 U2.40
BLE_TX: length 23.2
  BOTTOM w0.254: U2.10 15.5,35.8 16.19,36.49 16.19,47.07 18.83,49.71 22.98,49.71 J5.3
CTL_SHUTDOWN: length 46.5
  TOP w0.254: R42.1 27.64,32.14 28.4,32.9 32.2,32.9 33.1,33.8 33.1,45.1 34.6,46.6 49.4,46.6 v1(50.3,47.5) R169.2
  BOTTOM w0.254: SW11.5 58.11,44.09 54.7,47.5 v1(50.3,47.5)
CTL_SOURSE: length 83.1
  TOP w0.254: R176.2 v1(15.7,22.9) ; v1(30.4,49.48) 30.4,48.9 31.8,47.5 48.8,47.5 v1(50.3,49) R170.2 ; v1(14.56,35.7) R175.2 14.6,33.5 15.5,32.6 15.5,30.94 R174.2 14.6,30 15.7,28.9 v1(15.7,26.4) R177.2
  BOTTOM w0.254: v1(15.7,22.9) v1(15.7,26.4) ; v1(14.56,35.7) 14.56,39.14 12.8,40.9 12.8,44.5 17.6,49.3 17.6,51.9 18.5,52.8 29.6,52.8 30.4,52 v1(30.4,49.48) ; SW11.6 58.07,46.63 55.7,49 v1(50.3,49)
EARPHONR_L: length 27.2
  TOP w0.508: U10.1 6.45,30.15 5.2,28.9 5.2,14.5 5.7,14 7.7,14 11.9,9.8 U8.2
EARPHONR_R: length 8.1
  TOP w0.508: U12.1 6.81,23.05 6.4,22.64 6.4,17 U8.1
GAIN0: length 37.8
  TOP w0.254: U1.5 33.58,28.73 33.4,28.9 32.9,28.9 v1(32.2,28.2) ; v1(46.7,52) R171.2
  BOTTOM w0.254: v1(32.2,28.2) 32.2,33.27 34.83,35.91 41.83,35.91 47.07,41.15 47.07,51.63 v1(46.7,52)
GAIN1: length 33.8
  TOP w0.254: R173.2 47.71,50.47 v1(47.71,49.5) ; v1(33.1,28.2) 33.23,28.07 U1.6
  BOTTOM w0.254: v1(33.1,28.2) 33.1,33.6 35,35.5 42,35.5 47.71,41.21 v1(47.71,49.5)
LINN: length 18.8
  TOP w0.508: U11.3 v1(9.25,31.75) ; v1(23.4,29.8) C88.2
  BOTTOM w0.508: v1(9.25,31.75) 21.45,31.75 v1(23.4,29.8)
LINP: length 19.3
  TOP w0.508: v1(9.3,29.1) 9.3,29 8.55,28.25 U10.3 ; C87.2 25.98,27.22 24.95,28.25 v1(23.4,28.25)
  BOTTOM w0.508: v1(23.4,28.25) 22.55,29.1 v1(9.3,29.1)
Net_2: length 1.9
  TOP w0.254: 27.7,39.3 27.7,37.4
NEXT: length 43.7
  TOP w0.254: v1(18.8,19.4) 20,18.2 20.85,18.2 23.19,15.86 23.19,14.16 31.26,6.09 47.21,6.09 48.2,5.09 48.2,2.3 48.8,1.7 SW7.2
  BOTTOM w0.254: U2.31 v1(18.8,19.4)
OUTNL: length 8.8
  TOP w0.254: C82.1 73.7,30.26 L14.2
  TOP w1.8: J9.1 75.44,32 L14.2
OUTNR: length 8.8
  TOP w0.254: L16.2 73.7,9.06 C83.2
  TOP w1.8: L16.2 75.44,10.9 J10.1
OUTPL: length 8.8
  TOP w0.254: C81.1 73.7,44.24 L13.2
  TOP w1.8: L13.2 75.64,42.4 J9.2
OUTPR: length 8.8
  TOP w0.254: C84.2 73.7,23.14 L15.2
  TOP w1.8: L15.2 75.44,21.3 J10.2
PLAY/PAUSE: length 63.6
  TOP w0.254: v1(21,19.4) 24,16.4 24,15.53 24,14.5 31.6,6.9 68,6.9 68.7,6.2 68.7,2.5 69.5,1.7 SW9.2
  BOTTOM w0.254: v1(21,19.4) 21.85,19.4 22.1,19.65 U2.28
POWER_EN: length 40.8
  TOP w0.254: SW10.2 40.2,48.1 32.6,48.1 v1(31.9,48.8) 31.9,50.46 R35.2
  BOTTOM w0.254: v1(31.9,48.8) 22.2,48.8 21,47.6 U2.15
PRE: length 53.7
  TOP w0.254: SW8.2 61.6,2.2 61.6,5.3 60.41,6.49 31.43,6.49 23.59,14.33 23.59,15.69 23.59,16.03 20.93,18.7 20.6,18.7 v1(19.9,19.4)
  BOTTOM w0.254: U2.30 v1(19.9,19.4)
RINN: length 22.6
  TOP w0.508: C86.2 24.46,18.14 22.6,20 22.6,22.8 21.5,23.9 9.7,23.9 8.85,24.75 U13.3
RINP: length 20.6
  TOP w0.508: U12.3 8.05,21.15 9,20.2 21.38,20.2 C85.2
USB_DN: length 34.3
  BOTTOM w0.203: USB1.2 5.68,15.24 5.8,15.36 26.64,15.36 27.84,16.56 27.84,24.26 27.4,24.7 26.47,24.7 26.07,25.1 U2.24
USB_DP: length 33
  BOTTOM w0.203: U2.25 26.07,23.9 26.47,24.3 27.23,24.3 27.43,24.09 27.43,16.73 26.47,15.77 5.8,15.77 5.68,15.89 USB1.3
VOL+: length 27
  TOP w0.254: SW2.2 28.9,1.7 27.9,2.7 27.9,8.19 22.29,13.79 22.29,15.49 20.59,17.2 18.8,17.2 v1(16.6,19.4)
  BOTTOM w0.254: U2.33 v1(16.6,19.4)
VOL-: length 32.7
  TOP w0.254: SW6.2 36.92,1.7 33.02,5.6 31.06,5.6 22.7,13.96 22.7,15.66 20.66,17.7 19.4,17.7 v1(17.7,19.4)
  BOTTOM w0.254: U2.32 v1(17.7,19.4)
N16803192: length 143.3
  TOP w0.254: R36.2 39.6,52 SW10.3
  BOTTOM w0.254: SW2.3 38.98,1.7 40.19,2.92 43.98,2.92 SW6.3 49.38,1.7 50.59,2.92 54.38,2.92 SW7.3 59.38,1.7 60.59,2.92 64.38,2.92 SW8.3 69.88,1.7 71.09,2.92 74.88,2.92 SW9.3 77.9,1.7 78.89,2.69 78.89,9.59 80.7,11.4 80.7,42.4 72.6,50.5 57.4,50.5 56.77,51.13 50.06,51.13 48.56,52.63 46.44,52.63 46.06,52.26 46.06,52.24 44.42,50.6 41.4,50.6 SW10.3
N16804485: length 1.7
  TOP w0.254: D7.1 R37.2
N16804487: length 1.7
  TOP w0.254: D8.1 R38.2
N16804547: length 8.8
  TOP w0.254: D7.2 2.08,36.98 3.1,38 v1(6.7,38)
  BOTTOM w0.254: v1(6.7,38) U2.2
N16804550: length 8.2
  TOP w0.254: D8.2 2.08,34.72 3,33.8 5.2,33.8 v1(6.3,32.7)
  BOTTOM w0.254: v1(6.3,32.7) 7.5,32.7 7.8,33 U2.3
N16805157: length 7.9
  TOP w0.508: U7.1 20.76,7.29 L1.2
N16805178: length 4.5
  TOP w0.508: L1.1 C25.2 C24.1 R39.2
N16806457: length 6.5
  TOP w0.508: L2.2 15.44,3.99 U9.1
N16806471: length 4.5
  TOP w0.508: R40.2 C27.1 C28.2 L2.1
N16809175: length 9.6
  TOP w1.8: DC1.1 14.48,44.12 11.95,46.65 SW1.3
N16809398: length 7.4
  TOP w0.254: 32.9,31 33.23,30.68 U1.2 ; 32.9,31 33.23,31.32 34.4,31.32 ; 32.9,31 30.16,31 R42.2
N16810006: length 10.9
  TOP w0.3: U1.7 32.67,27.43 32.6,27.5 31.76,27.5 29.26,25 R44.2 C29.2
N16810025: length 11.7
  TOP w0.3: U1.9 32.51,26.12 32.5,26.12 31.95,26.12 31.94,26.12 31.23,26.12 27.7,22.6 26.96,22.6 C31.2 R45.2
N16810063: length 13.6
  TOP w0.254: R46.2 C30.2 27.1,19.46 25.24,19.46 24.54,20.16 R45.1
  TOP w0.3: U1.10 31.48,25.48 27.84,21.84 R46.2
N16810289: length 11.4
  TOP w0.3: 34.4,24.82 33.12,24.82 32.6,24.3 32.6,18.7 32.04,18.14 C86.1
N16810301: length 13.5
  TOP w0.3: C85.1 32.3,15.4 33.2,16.3 33.2,23.9 33.48,24.18 U1.12
N16811253: length 5.7
  TOP w0.3: 39.5,23.6 39.58,23.52 42.08,23.52 42.1,23.5 ; U1.15 42.08,22.88 42.1,22.9 ; U1.15 39.67,22.88 39.6,22.8 ; U1.15 40.8,22.4
N16811667: length 5.5
  TOP w0.3: 42,30.7 41.98,30.68 U1.27 39.73,30.68 39.6,30.8 ; 40.8,31.32 40.8,31.8 ; 40.8,31.32 41.98,31.32 42,31.3 ; 40.8,31.32 39.58,31.32 39.5,31.4
N16812366: length 2.4
  TOP w0.3: 43.1,30.2 42.92,30.02 40.8,30.02
N16812369: length 7
  TOP w0.254: C77.2 49.6,41.68 C96.2 ; 41.5,29.3 41.42,29.38 U1.25
  TOP w1.8: C77.2 53.68,42.38 L13.1
N16812727: length 10.1
  TOP w0.254: C78.2 49.6,32.82 C95.2
  TOP w0.3: U1.23 44.08,28.07 44.5,28.5
  TOP w1.8: L14.1 53.68,32.02 C78.2
N16812730: length 5.9
  TOP w0.3: U1.22 46.02,27.43 46.5,27.9
N16812892: length 7.9
  TOP w0.254: C80.2 49.6,20.68 C94.2
  TOP w0.3: 42.3,26.1 42.27,26.12 U1.20
  TOP w1.8: L15.1 53.62,21.38 C80.2
N16812895: length 5.8
  TOP w0.254: C93.2 49.6,11.62 50.1,11.12 C79.2
  TOP w0.3: 40.8,24.82 40.88,24.82 40.9,24.8
  TOP w1.8: 50.97,11.09 53.51,11.09 L16.1
N16812974: length 2
  TOP w0.3: 42.77,24.18 U1.17
N16812997: length 1.3
  TOP w0.3: U1.21 42.08,26.77
N16813988: length 5.7
  TOP w0.3: C88.1 29.05,30.02 34.4,30.02
N16814000: length 6.5
  TOP w0.3: U1.4 31.1,29.38 C87.1
N16814782: length 2.4
  TOP w0.254: R174.1 12.89,30.15 U10.6
N16815623: length 2.4
  TOP w0.254: U11.6 12.89,33.65 R175.1
N16815830: length 2.5
  TOP w0.254: U12.6 12.99,23.05 R176.1
N16816045: length 2.6
  TOP w0.254: U13.6 12.89,26.65 R177.1
N16817792: length 1.5
  TOP w0.254: C93.1 R47.1
N16817979: length 1.5
  TOP w0.254: C94.1 R48.1
N16818097: length 1.5
  TOP w0.254: C95.1 R49.1
N16818322: length 1.5
  TOP w0.254: C96.1 R50.1
N16818770: length 0.8
  TOP w0.508: 24.9,38.4 24.85,38.45 U14.6
N16818772: length 2
  TOP w0.254: C9.1 26.85,37.29 U14.1
N16818790: length 5.1
  TOP w0.254: R15.2 R17.1 28.64,39.76 28.05,40.35 U14.3
N16818960: length 2
  TOP w0.254: R16.1 24.74,40.94 U14.4
N16821549: length 10.5
  TOP w0.254: R167.2 v1(50.3,52) R171.1
  BOTTOM w0.254: SW11.8 50.59,51.71 v1(50.3,52)
N16821551: length 10.9
  TOP w0.254: R173.1 v1(50.3,50.5) R168.2
  BOTTOM w0.254: v1(50.3,50.5) 56.7,50.5 58.03,49.17 SW11.7

## Copper pours and planes (outline as drawn; the poured copper is in the pictures)
AGND on TOP (solid shape): 58.11,4.38 58.18,4.2 58.11,4.02 57.57,3.48 56.79,4.2 57.57,4.92
AGND on TOP (solid shape): 59.91,4.2 59.13,3.48 58.59,4.02 58.52,4.2 58.59,4.38 59.13,4.92
AGND on BOTTOM (solid shape): 3.9,17.3 3.94,17.19 3.9,17.07 3.1,16.3 2.05,17.2 3.1,18.1
AGND on BOTTOM (solid shape): 68.26,48.03 68.4,48.07 68.54,48.03 69.39,47.18 68.4,46.57 67.41,47.18
AGND on BOTTOM (solid shape): 68.26,45.49 68.4,45.53 68.54,45.49 69.39,44.64 68.4,44.03 67.41,44.64
AGND on BOTTOM (solid shape): 69.39,48.62 68.54,47.77 68.4,47.73 68.26,47.77 67.41,48.62 68.4,49.23
AGND on BOTTOM (solid shape): 69.39,46.08 68.54,45.23 68.4,45.19 68.26,45.23 67.41,46.08 68.4,46.69
AGND on BOTTOM (solid shape): 70.02,51.83 70.05,51.71 70.02,51.59 69.5,51.16 68.34,51.71 69.5,52.26
AGND on BOTTOM (solid shape): 70.02,49.29 70.05,49.17 70.02,49.05 69.5,48.62 68.34,49.17 69.5,49.72
AGND on TOP: 85.5,3.2 84.61,0.99 82.4,0.1 3.2,0.1 1,1 0.1,3.2 0.1,20.6 4.7,20.6 4.7,34.5 0.1,34.5 0.1,50.8 1,53 3.2,53.9 82.4,53.9 84.6,53 85.5,50.8 ; 14 cut-outs
AGND on BOTTOM: 82.4,53.9 84.6,53 85.5,50.8 85.5,3.2 84.61,0.99 82.4,0.1 3.2,0.1 1,1 0.1,3.2 0.1,20.6 5,20.6 5,34.6 0.1,34.6 0.1,50.8 1,53 3.2,53.9 ; 8 cut-outs
PVCC on TOP: 36,21.3 36,16.7 36.3,16.4 37.2,16.4 37.5,16.7 37.5,21.3
PVCC on TOP: 37.2,33 37.2,37.3 36.9,37.6 36.1,37.6 35.9,37.4 35.9,33
PVCC on TOP: 18.6,48.4 27.5,48.4 27.6,48.3 27.6,43.3 27.4,43.1 18.6,43.1
PVCC on BOTTOM: 31.1,13 28.6,15.5 28.6,38.9 24.1,43.4 24.1,48.3 30.4,48.3 31.6,47.1 31.6,42.4 33,41 39,41 39.8,40.2 39.8,37.9 39,37.1 32.5,37.1 31.6,36.2 31.6,18.5 33,17.1 38.8,17.1 39.8,16.1 39.8,13.7 39.1,13
VCC_3.3V on TOP: 15.8,34.1 18.8,34.1 19.3,33.6 19.3,24.4 17.3,24.4 17.3,31 16.8,31.5 15.8,31.5
VCC_24V on TOP: 19.6,36.4 19.3,36.7 19.3,38.5 19,38.8 17.1,38.8 16,39.9 16,44.6 15.1,45.5 15.1,47.4 15.5,47.8 18.1,47.8 18.1,42.7 18.4,42.4 19.7,42.4 19.7,40.3 20.2,39.8 24.8,39.8 24.8,39 23.2,39 22.5,38.3 22.5,36.6 22.3,36.4
BLE_SPK_R_P1 on BOTTOM (solid shape): 9.28,21.73 9.38,21.7 9.43,21.6 9.3,20.1 8.84,20.69 8.5,21.5
CTL_SHUTDOWN on BOTTOM (solid shape): 59.7,44.64 58.71,44.03 57.5,43.54 57.37,44.7 57.41,44.79 57.5,44.83
CTL_SOURSE on BOTTOM (solid shape): 59.7,47.18 58.71,46.57 57.5,46.08 57.37,47.2 57.41,47.29 57.5,47.33
LINN on TOP (solid shape): 26.04,29.8 25.18,28.9 24.34,29.65 24.29,29.8 24.34,29.95 25.18,30.7
LINP on TOP (solid shape): 26.78,28 26.02,27.05 25.18,26.2 24.92,28.02 25,28.2 25.18,28.28
RINN on TOP (solid shape): 26.22,18.14 25.36,17.24 24.52,17.99 24.47,18.14 24.52,18.28 25.36,19.04
RINP on TOP (solid shape): 26.98,16.3 26.22,15.36 25.38,14.5 25.02,16.29 25.09,16.47 25.28,16.55
N16804547 on TOP (solid shape): 2.61,37.64 2.7,37.6 2.74,37.51 2.59,36.29 2.06,36.88 1.58,37.51
N16804550 on TOP (solid shape): 2.72,34.21 2.68,34.11 2.58,34.08 1.58,34.29 2.07,34.93 2.59,35.51
N16810289 on TOP (solid shape): 30.56,18.23 30.59,18.14 30.56,18.05 29.81,17.29 28.97,18.14 29.81,18.98
N16810301 on TOP (solid shape): 30.58,15.49 30.61,15.4 30.58,15.31 29.82,14.55 28.98,15.4 29.82,16.25
N16811253 on TOP: 38.3,18.8 38.1,19 38.1,23.3 38.5,23.7 39.7,23.7 39.7,22.5 41.9,22.5 41.9,23.7 42.4,23.7 42.9,23.2 42.9,21.8 42.7,21.6 41.7,21.6 41.4,21.3 41.4,18.8
N16811667 on TOP: 38.3,30.5 38,30.8 38,35.2 38.2,35.4 41.3,35.4 41.3,32.8 41.5,32.6 42.5,32.6 42.8,32.3 42.8,30.7 42.6,30.5 41.9,30.5 41.9,31.7 39.7,31.7 39.7,30.5
N16812366 on TOP: 40,29.9 43.6,29.9 44.5,30.8 44.5,43.5 45.4,44.4 51.3,44.4 51.3,46.2 44.5,46.2 43.4,45.1 43.4,30.8 42.8,30.2 40,30.2
N16812369 on TOP: 40,29.2 44.5,29.2 46.8,31.5 46.8,40.7 47.6,41.5 51.3,41.5 51.3,43.2 46.8,43.2 45.6,42 45.6,31.4 43.7,29.5 40,29.5
N16812727 on TOP: 40,27.9 45.1,27.9 48.4,31.2 51.4,31.2 51.4,33 48.8,33 44,28.2 40,28.2
N16812730 on TOP: 40,27.2 50.7,27.2 51.4,27.9 51.4,30.1 48.5,30.1 46,27.6 40,27.6
N16812892 on TOP: 40,26.3 45.4,26.3 49.5,22.2 51.3,22.2 51.3,20.5 49.4,20.5 44,25.9 40,25.9
N16812895 on TOP: 40,25 44.5,25 46.6,22.9 46.6,12.6 47.2,12 51.4,12 51.4,10.3 46.2,10.3 45.4,11.1 45.4,23.2 43.9,24.7 40,24.7
N16812974 on TOP: 39.9,24.3 43.7,24.3 44.2,23.8 44.2,9.4 44.5,9.1 51.5,9.1 51.5,7.5 51.4,7.4 43.8,7.4 43.4,7.8 43.4,23.4 42.8,24 39.9,24
N16812997 on TOP: 40,26.9 50.7,26.9 51.3,26.3 51.3,23.3 49.4,23.3 46.1,26.6 40,26.6
N16813988 on TOP (solid shape): 30.35,30.14 30.41,30.04 30.38,29.93 29.62,29.18 28.79,29.79 29.56,30.57
N16814000 on TOP (solid shape): 29.72,28.15 29.83,28.1 29.87,27.99 29.62,26.2 28.8,27.07 28.02,28
N16818770 on TOP: 23.6,38.8 24.9,38.8 25.2,38.5 25.2,35.3 25.3,35.2 25.7,35.2 25.7,31.8 25.4,31.5 21.5,31.5 21.5,34.7 23.6,36.8
N16821549 on BOTTOM (solid shape): 58.63,51.71 57.5,51.16 56.98,51.63 56.95,51.71 56.98,51.79 57.5,52.26
N16821551 on BOTTOM (solid shape): 59.7,49.72 58.71,49.11 57.5,48.62 57.35,49.72 57.39,49.81 57.48,49.85
AGND on TOP (solid shape): 42.5,19.35 42.92,18.84 42.04,18.45 41.84,18.51 41.75,18.7 42,19.76
VCC_3.3V on TOP (solid shape): 30.79,52.62 30.88,52.59 30.92,52.5 30.8,51.54 30.32,51.98 29.88,52.46
VCC_3.3V on TOP (solid shape): 13.08,28.54 13.5,28.04 12.54,27.79 12.36,27.87 12.29,28.05 12.58,28.96
VCC_3.3V on TOP (solid shape): 30.66,37.41 30.84,37.33 30.91,37.15 30.62,36.24 30.12,36.66 29.7,37.16
VCC_3.3V on TOP (solid shape): 13.6,25.56 13.19,25.06 12.68,24.64 12.24,25.51 12.29,25.72 12.49,25.81
VCC_3.3V on TOP (solid shape): 13.7,21.86 13.29,21.37 12.78,20.94 12.2,21.77 12.23,22 12.44,22.11
BLE_MIC_AP on TOP (solid shape): 18.53,16.12 18.62,16.31 18.83,16.37 19.7,15.96 19.28,15.45 18.78,15.04
BLE_MIC_BIAS on TOP (solid shape): 20.05,16.2 20.15,16.4 20.37,16.44 21.22,15.96 20.8,15.45 20.3,15.04
BLE_SPK_L_P1 on TOP (solid shape): 10.68,28.27 11.18,27.93 10.14,27.7 10.04,27.73 10,27.82 10.12,28.58
CTL_SHUTDOWN on TOP (solid shape): 28.08,32.72 28.18,32.69 28.22,32.6 28.1,31.54 27.62,31.97 27.18,32.46
CTL_SOURSE on TOP (solid shape): 15.18,33.05 15.15,32.95 15.06,32.92 14.1,33.04 14.54,33.52 15.02,33.96
CTL_SOURSE on TOP (solid shape): 15.18,29.55 15.15,29.45 15.06,29.42 14.1,29.54 14.54,30.02 15.02,30.46
NEXT on TOP (solid shape): 51.13,1.7 50.47,1.07 49.93,1.61 49.9,1.7 49.93,1.79 50.47,2.33
PLAY/PAUSE on TOP (solid shape): 71.63,1.7 70.97,1.07 70.43,1.61 70.4,1.7 70.43,1.79 70.97,2.33
PRE on TOP (solid shape): 61.51,3.16 61.65,3.19 61.73,3.07 61.76,2.24 61.09,1.67 60.68,2.33
RINP on TOP (solid shape): 8.73,20.72 8.65,20.54 8.45,20.47 7.42,20.83 7.9,21.19 8.48,21.48
VOL+ on TOP (solid shape): 30.73,1.7 30.07,1.07 29.53,1.61 29.5,1.7 29.53,1.79 30.07,2.33
VOL- on TOP (solid shape): 40.73,1.7 40.07,1.07 39.53,1.61 39.5,1.7 39.53,1.79 40.07,2.33
N16803192 on BOTTOM (solid shape): 36.37,1.79 36.4,1.7 36.37,1.61 35.83,1.07 35.17,1.7 35.83,2.33
N16803192 on BOTTOM (solid shape): 46.37,1.79 46.4,1.7 46.37,1.61 45.83,1.07 45.17,1.7 45.83,2.33
N16803192 on BOTTOM (solid shape): 56.77,1.79 56.8,1.7 56.77,1.61 56.23,1.07 55.57,1.7 56.23,2.33
N16803192 on BOTTOM (solid shape): 66.77,1.79 66.8,1.7 66.77,1.61 66.23,1.07 65.57,1.7 66.23,2.33
N16803192 on BOTTOM (solid shape): 77.27,1.79 77.3,1.7 77.27,1.61 76.73,1.07 76.07,1.7 76.73,2.33
N16804485 on TOP (solid shape): 5.21,36.98 5.23,36.9 5.21,36.82 4.62,36.29 4.08,36.9 4.62,37.51
N16804487 on TOP (solid shape): 5.21,34.98 5.23,34.9 5.21,34.82 4.62,34.29 4.08,34.9 4.62,35.51
N16810063 on TOP (solid shape): 25.12,19.7 25.08,19.61 24.99,19.58 24.08,19.74 24.52,20.22 25,20.66
N16810063 on TOP (solid shape): 28.27,22.44 28.39,22.41 28.45,22.3 28.3,21.24 27.82,21.67 27.38,22.16
N16814782 on TOP (solid shape): 13.07,30 12.58,29.54 12,30.07 11.98,30.17 12.03,30.26 12.58,30.46
N16815623 on TOP (solid shape): 13.07,33.5 12.58,33.04 12,33.57 11.98,33.67 12.03,33.76 12.58,33.96
N16815830 on TOP (solid shape): 13.17,22.9 12.68,22.44 12.1,22.97 12.08,23.07 12.13,23.16 12.68,23.36
N16818960 on TOP (solid shape): 24.65,41 24.76,40.98 24.8,40.88 24.68,40.03 24.12,40.33 23.62,40.68

Small or netless copper shapes (teardrops, artwork), in the pictures only: 141 on TOP, 61 on BOTTOM

## Text on the board
Ref Des/Silkscreen Bottom: NAME:OPAMP_TEST_V10A.BRD | DATE:2017_05_10 | BY XXXLZJXXX | GAIN0 | GAIN1 | SOURSE | SD | dB | 20 | 26 | 32 | 36 | BLUTOOTH | EARPHONE | UNABLE | ABLE | 0 | 1
Ref Des/Silkscreen Top: G | V | T | R | VOL | EN | NEXT | PRE | PLAY | L-N | L-P | R-N | R-P
DIMENSION: FIGURE | SIZE | 0.3048 | 0.4572 | 0.8 | 0.889 | 0.9652 | 1.524 | 2.032 | 3.4036 | 2.4x0.8 | 3.0x1.0 | DRILL CHART: TOP to BOTTOM | ALL UNITS ARE IN MILLIMETERS | PLATED | QTY | 222 | 15 | 4 | 19 | 12 | 2 | 1
